# Altium PCB pdb-25.PcbDoc (part 1 of 4)
Units mil, origin at the board's own origin, x right, y up, seen from the top; angles counter-clockwise.
Board outline 5000 x 5500 mil, 4 copper layers (Top Layer, GND, 3V3, Bottom Layer), stack 23.756 mil thick; 410 components, 167 nets, 1014 pads, 884 vias.
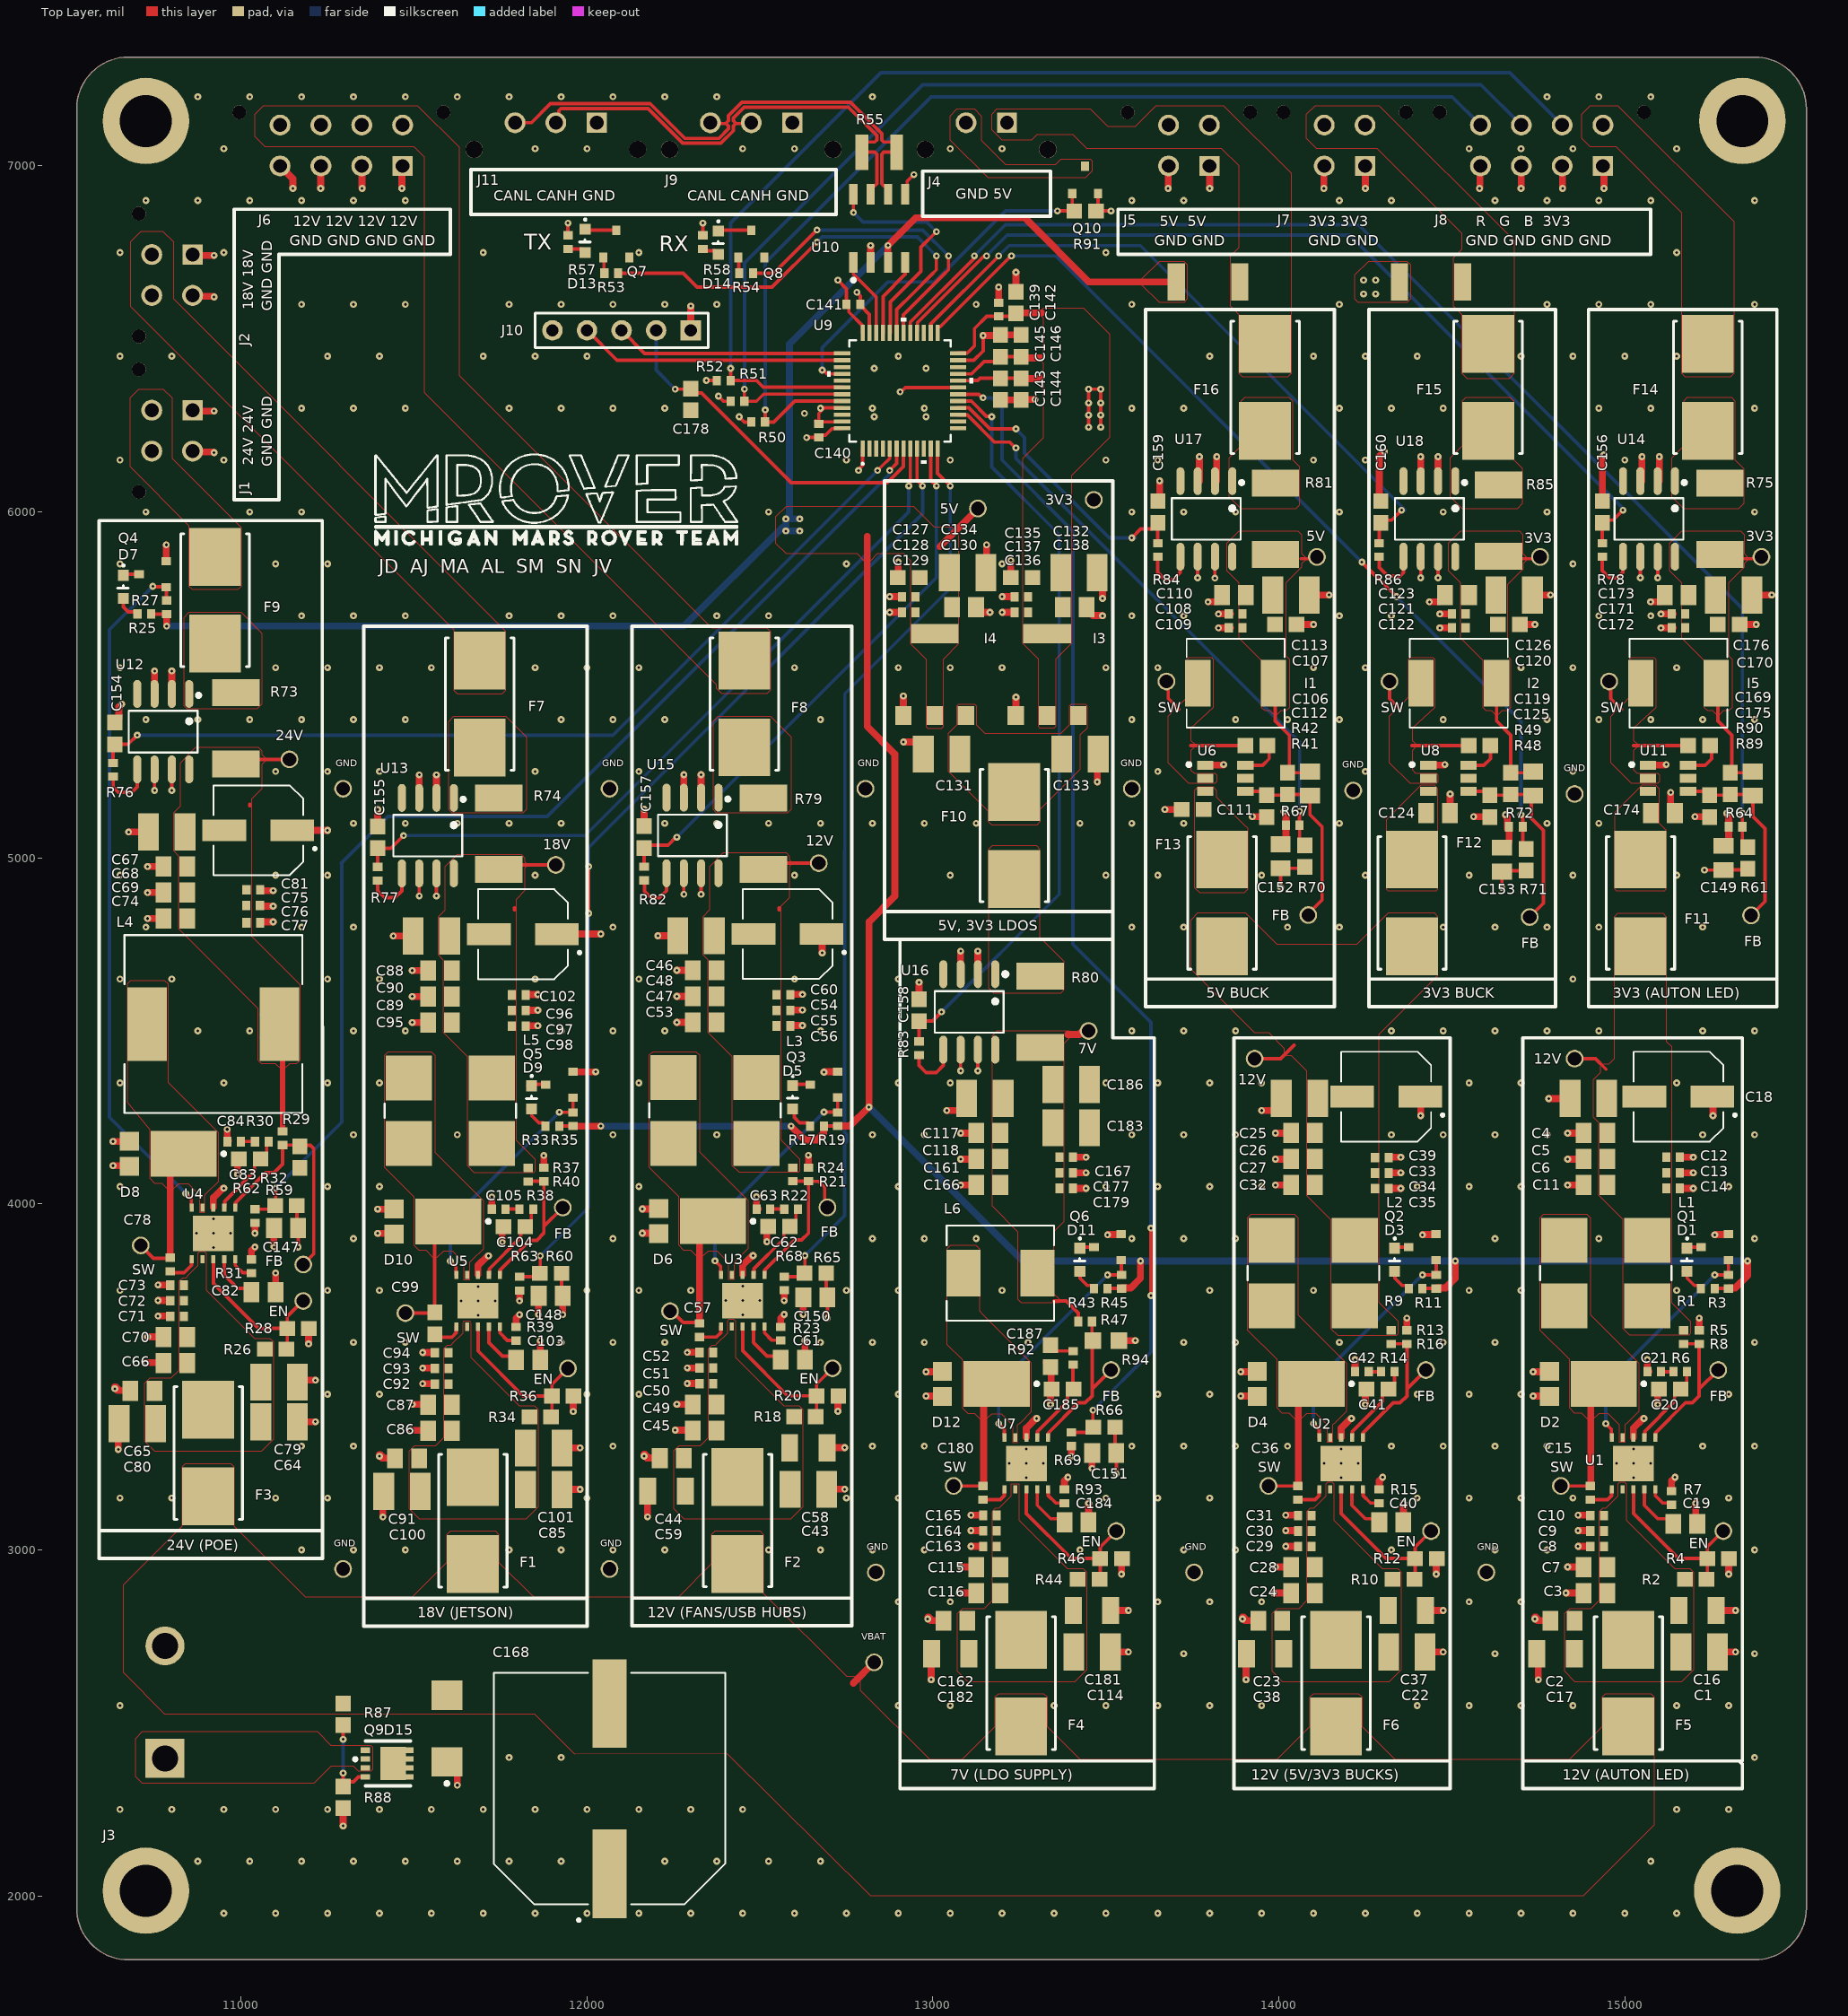
[diagram p0: Top Layer view]
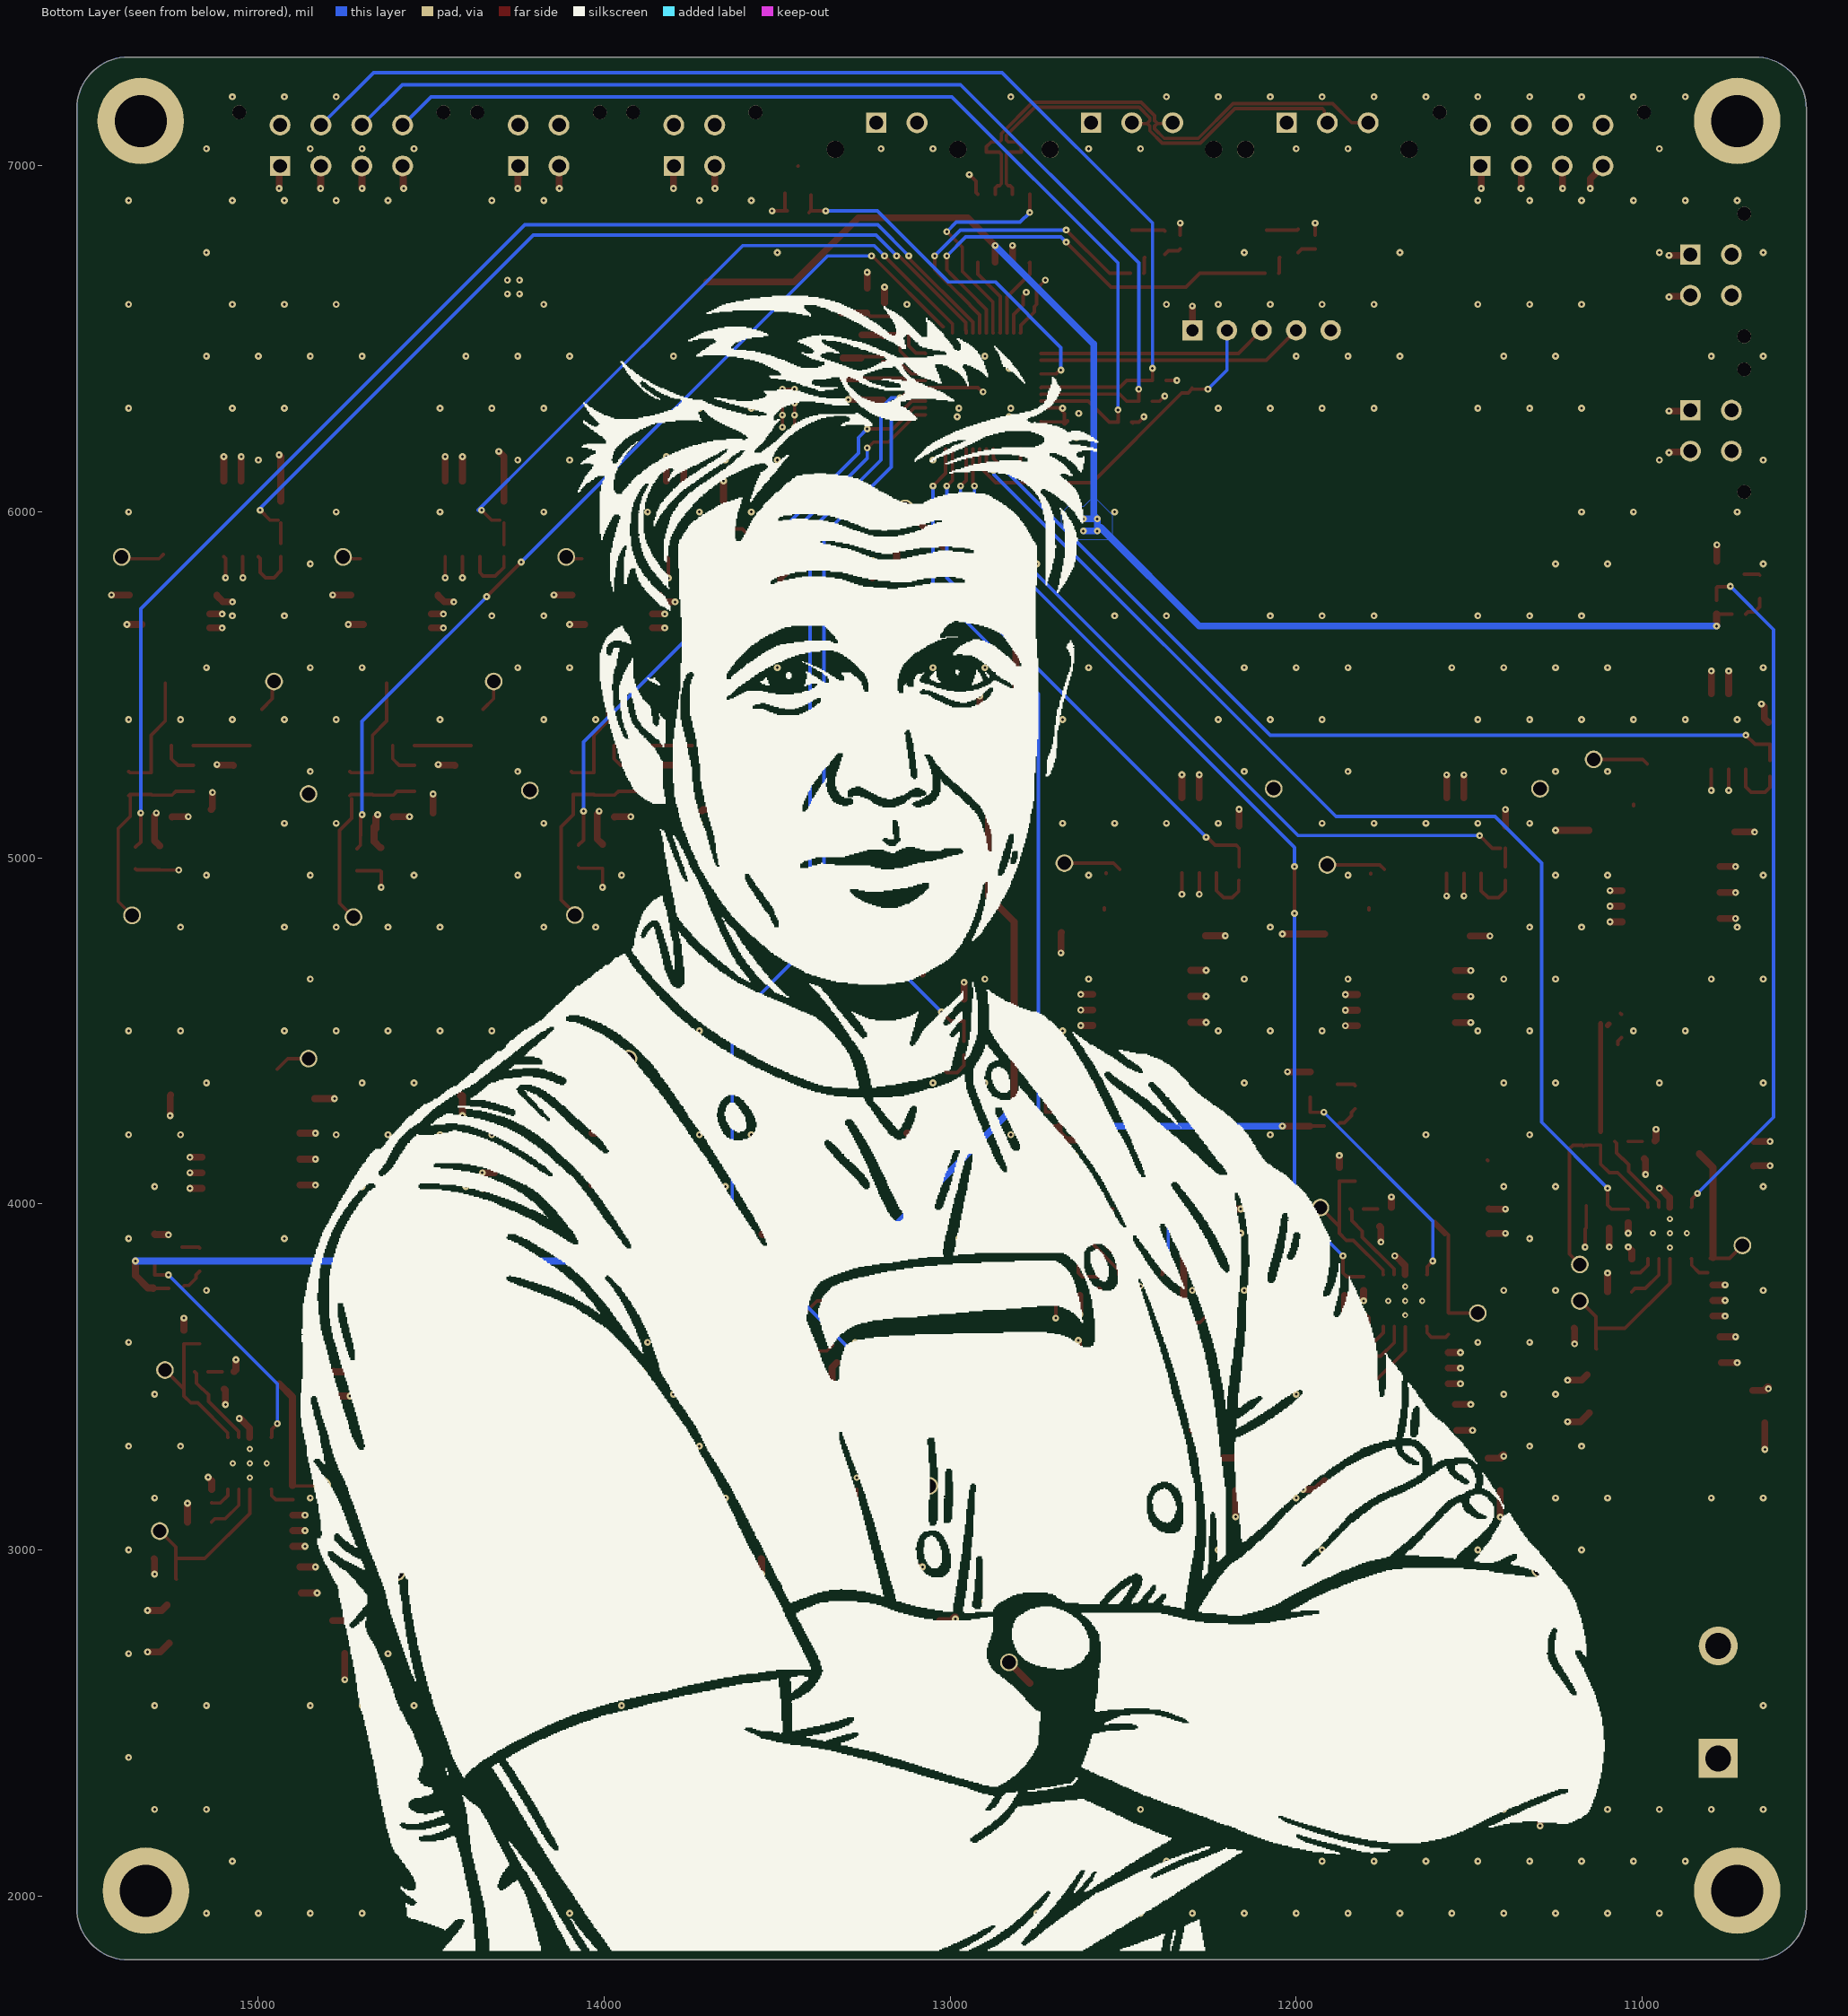
[diagram p1: Bottom Layer view, seen from below]
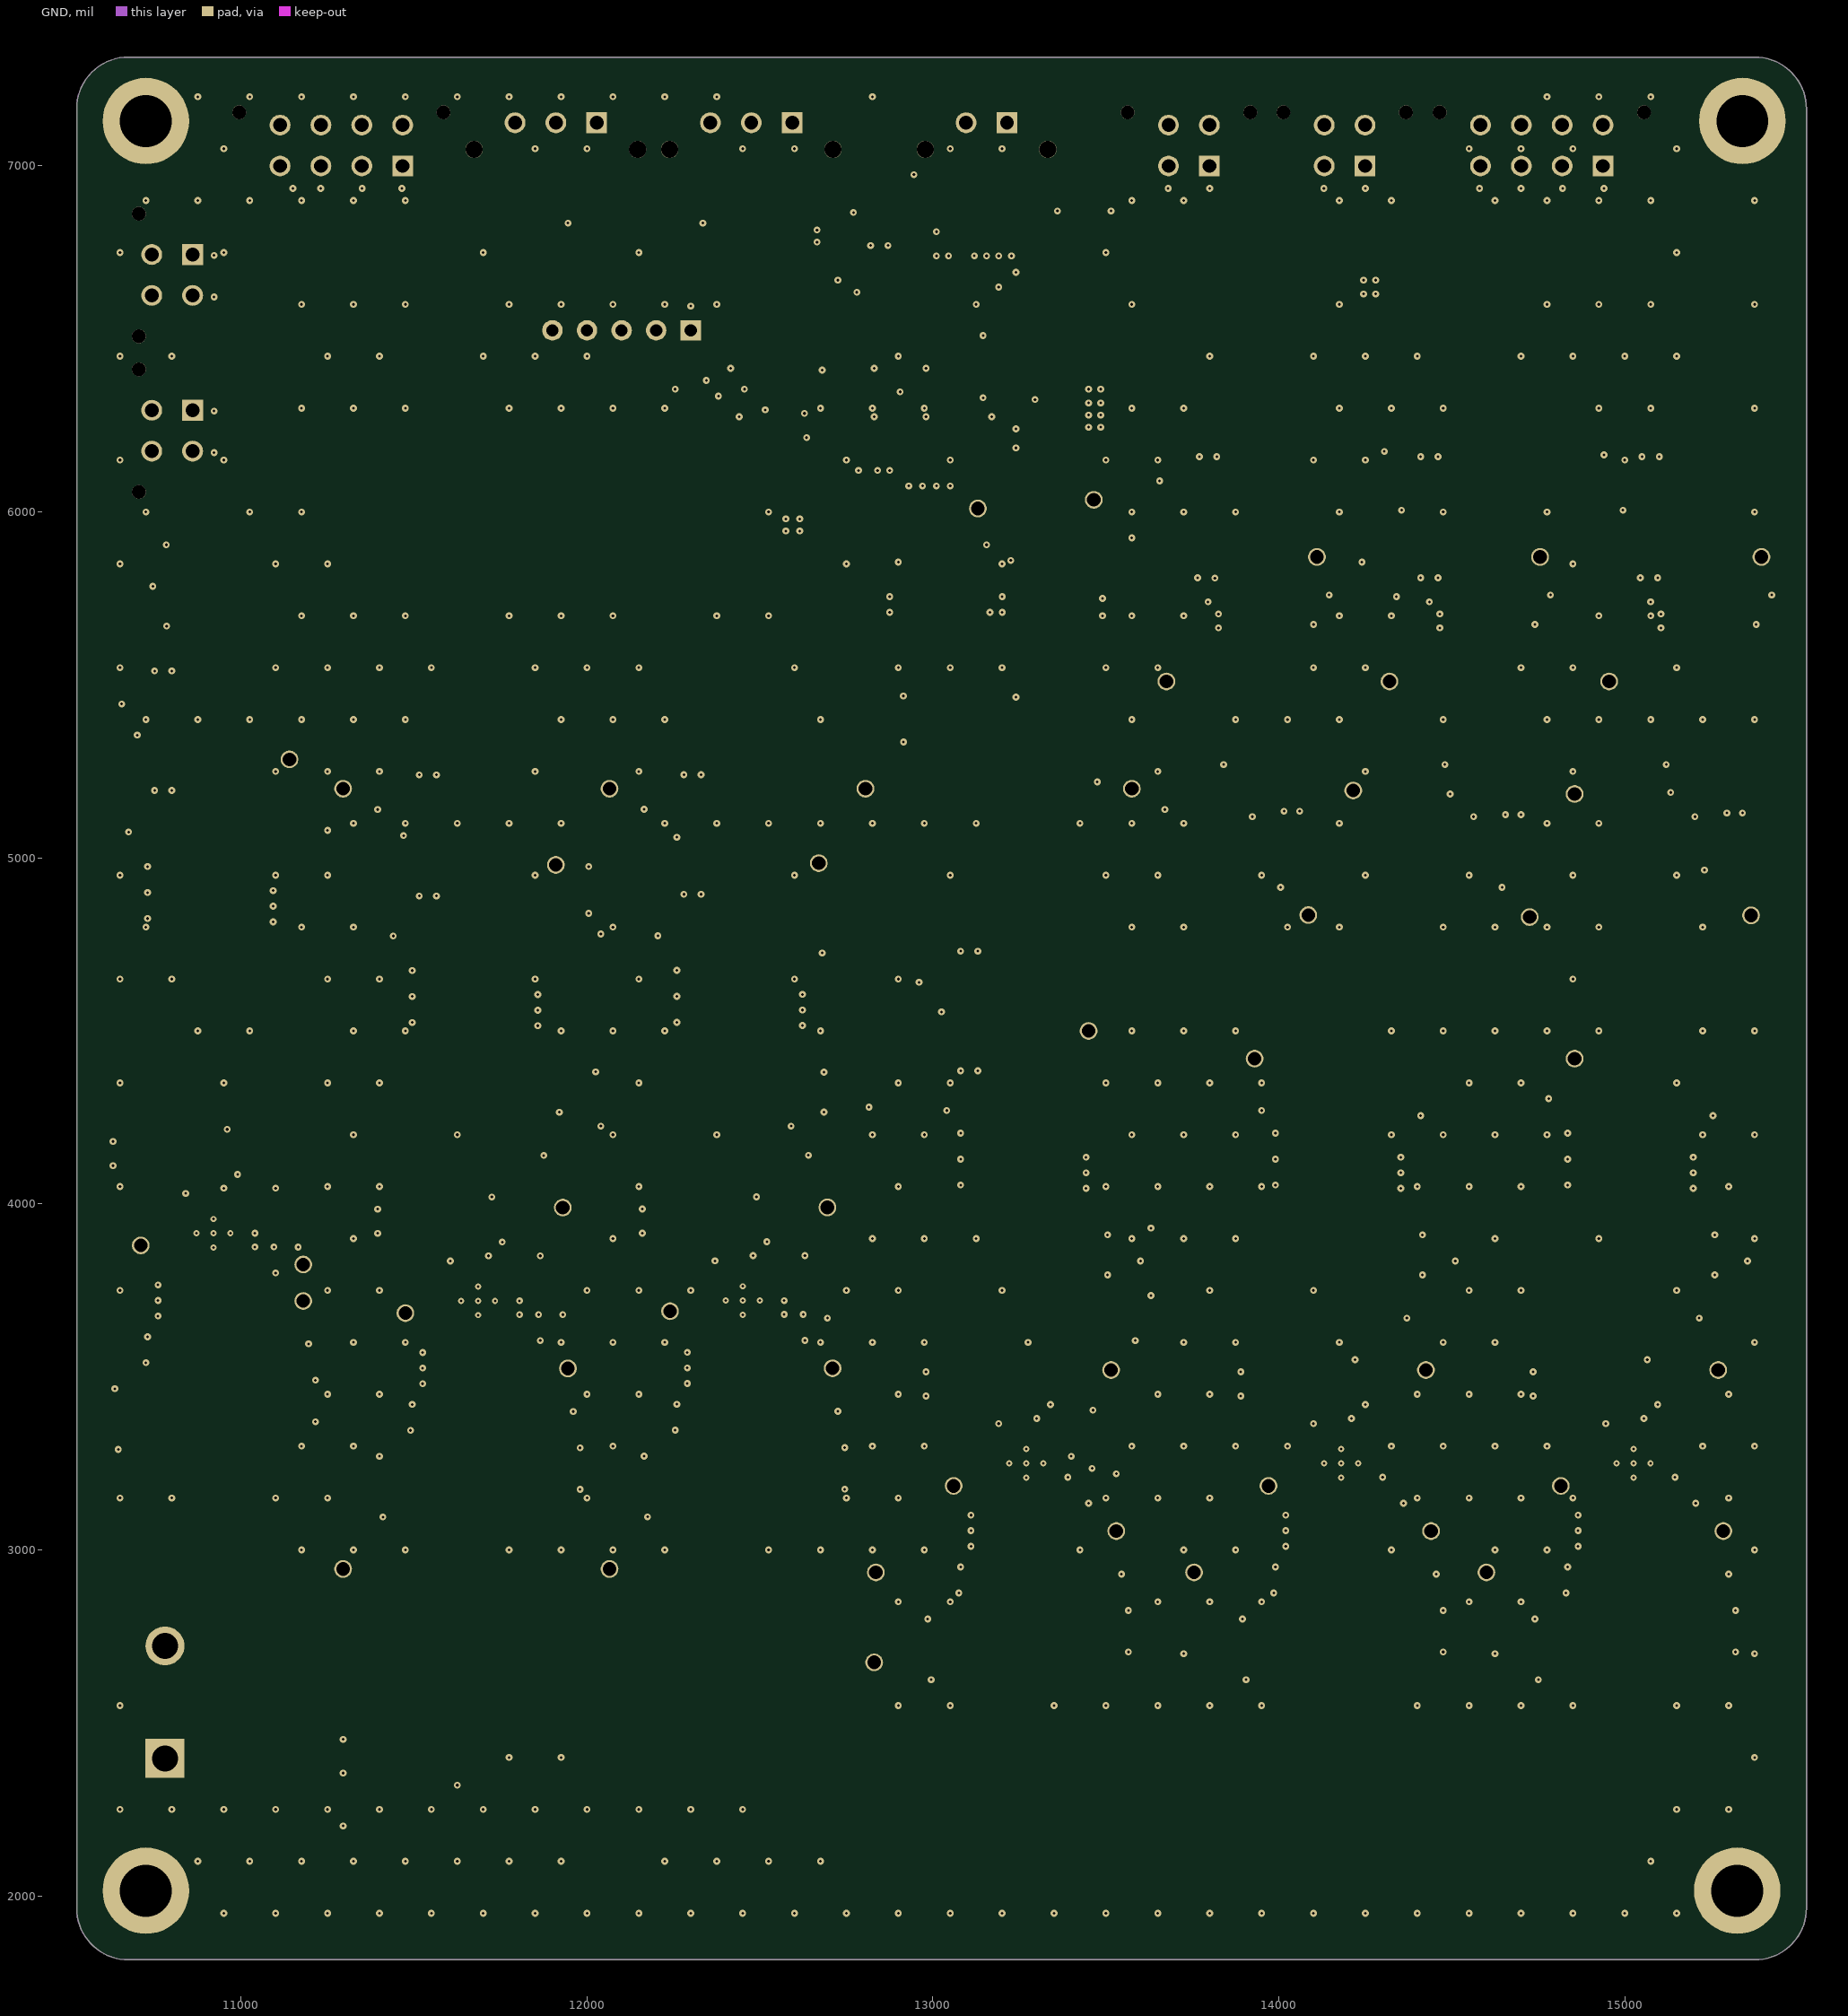
[diagram p2: GND]
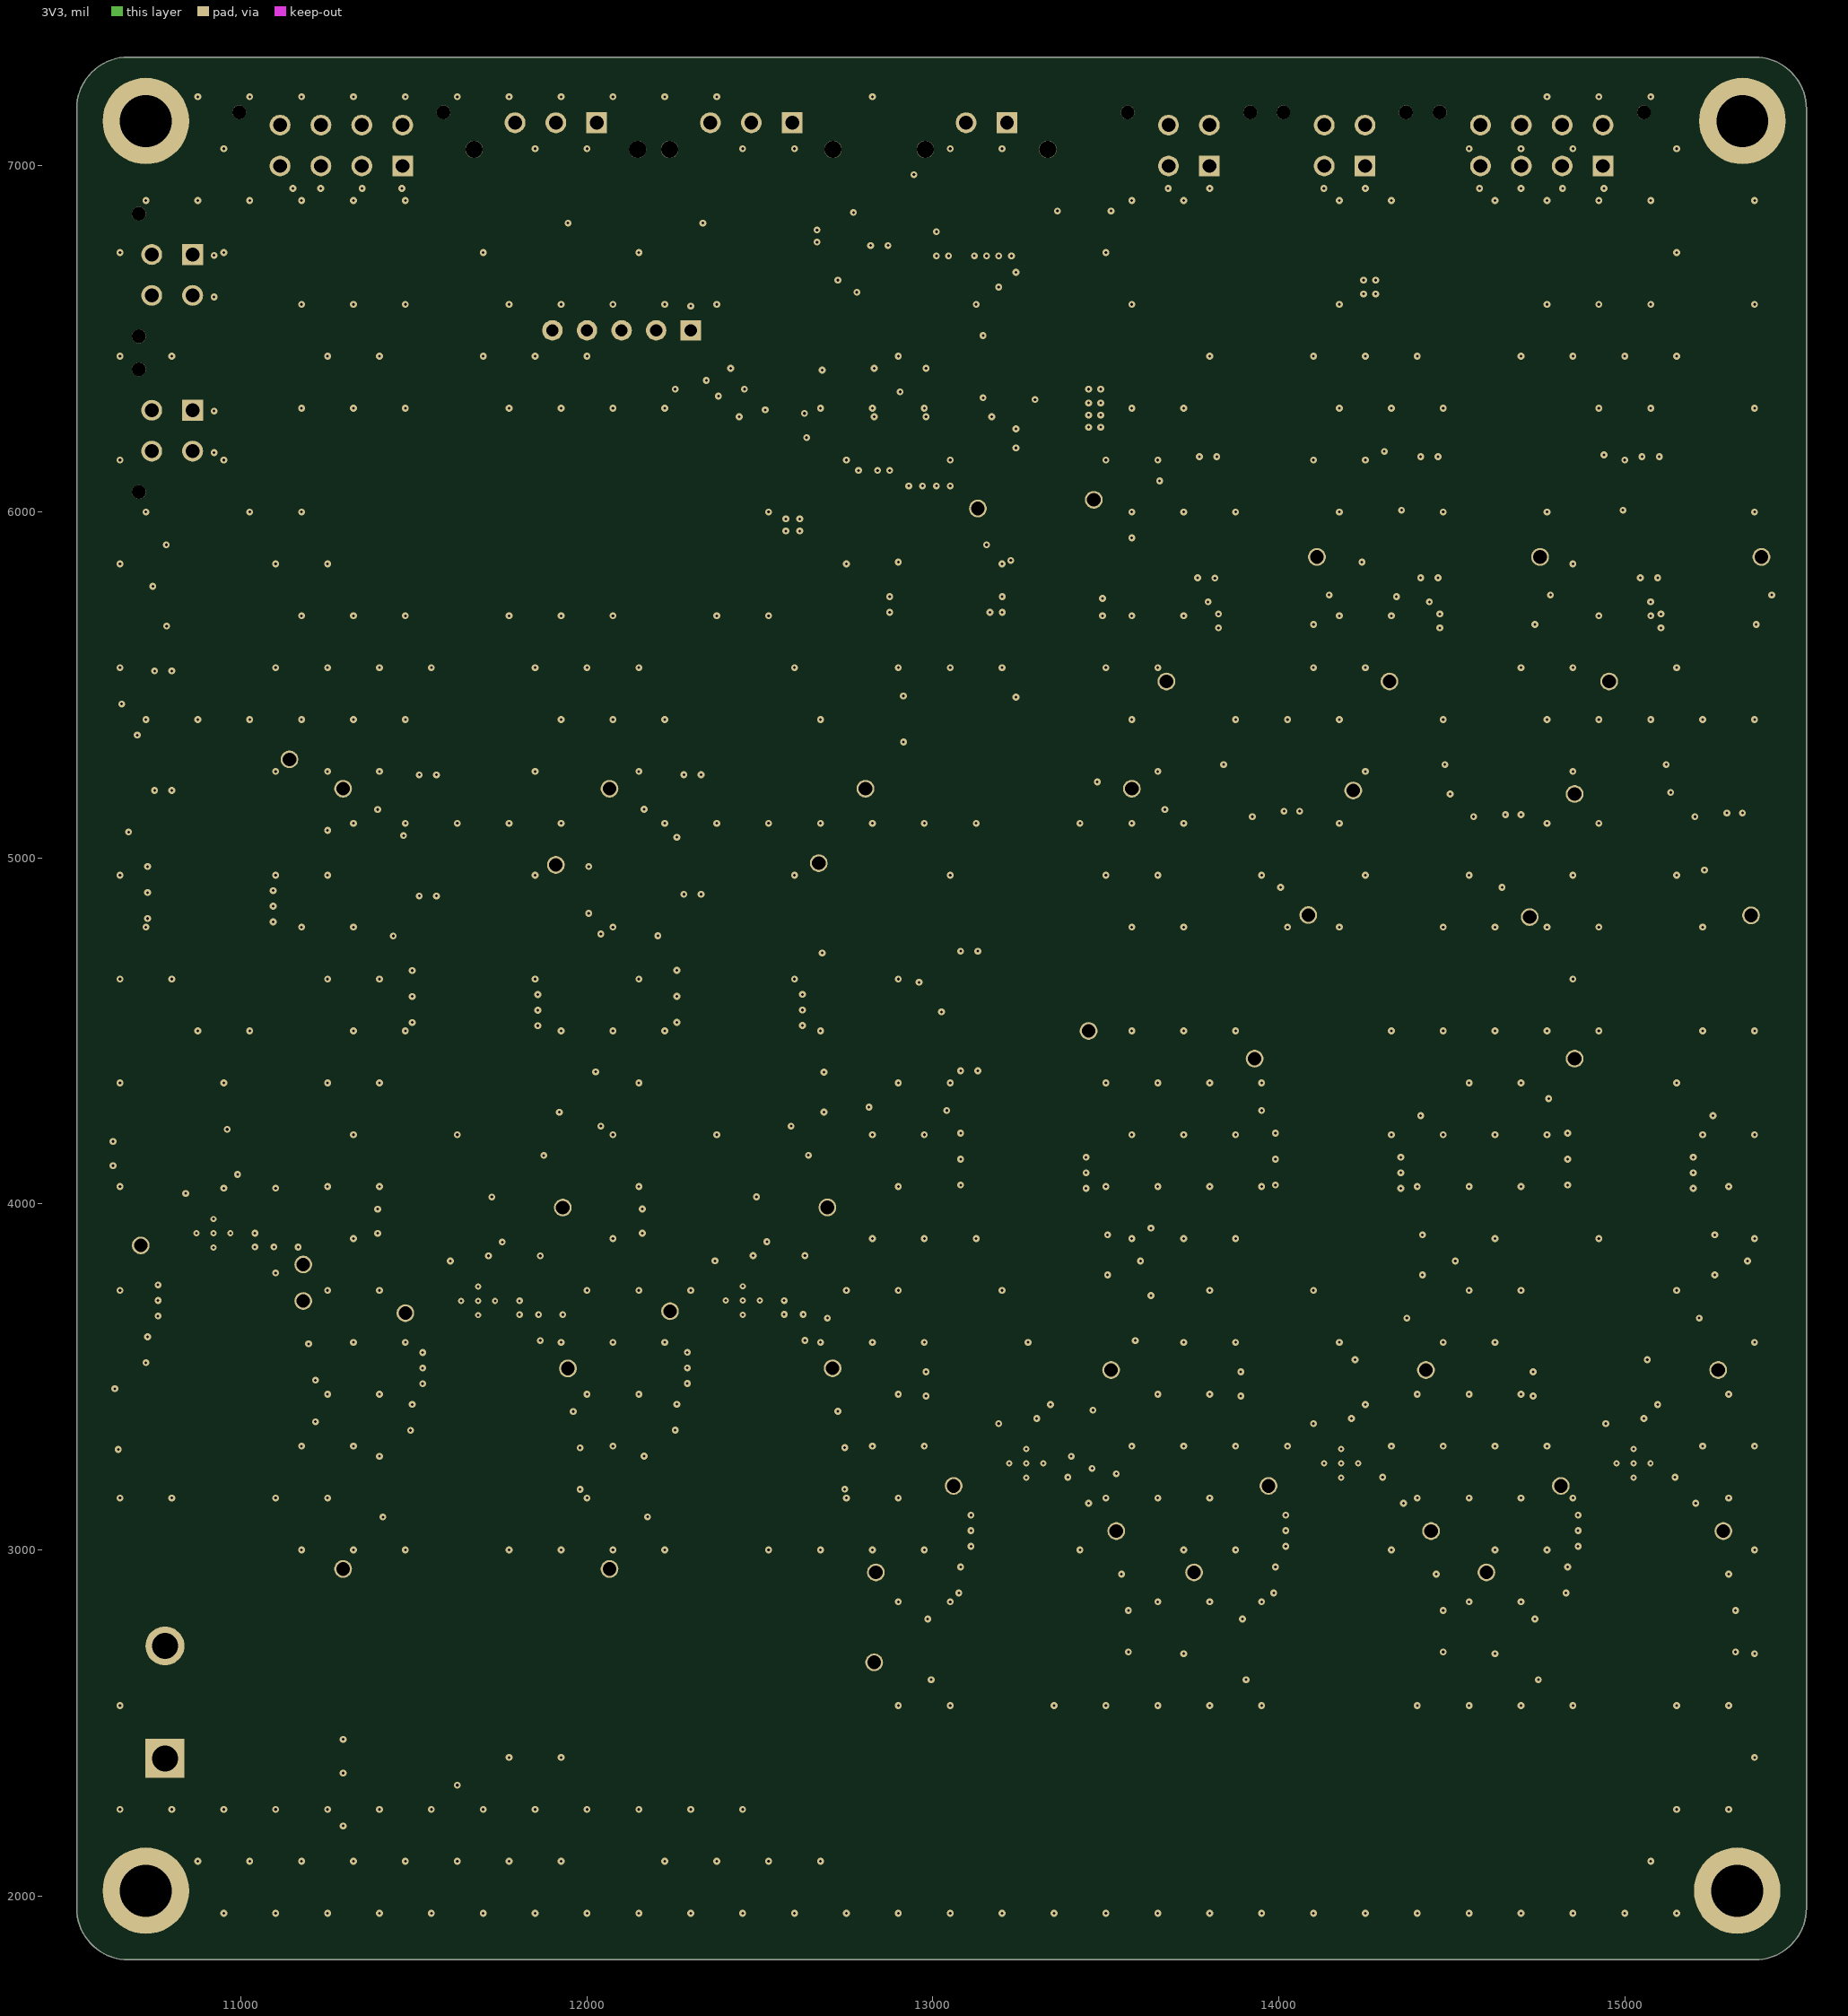
[diagram p3: 3V3]

## Layer stack, top to bottom
Top Solder: solder mask 0.4, Solder Resist, Dk 3.5
Top Layer: signal copper 1.4
Dielectric 2: prepreg 2.8, PP-006, Dk 4.1
GND: signal copper 1.378
Dielectric 1: dielectric 12.6, FR-4, Dk 4.8
3V3: signal copper 1.378
Dielectric 3: prepreg 2.8, PP-006, Dk 4.1
Bottom Layer: signal copper 1.4
Bottom Solder: solder mask 0.4, Solder Resist, Dk 3.5

## Board outline
10525,1965 10525,7165 cw(c10675,7165) 10675,7315 15375,7315 cw(c15375,7165) 15525,7165 15525,1965 cw(c15375,1965) 15375,1815 10675,1815 cw(c10675,1965)

## Design rules (kind name [scope] priority, off if disabled: settings)
BoardOutlineClearance [All] p1: gap=7.87 ignorepadtopadclearanceinfootprint=FALSE
Clearance [All] p1: gap=4 ignorepadtopadclearanceinfootprint=TRUE except(5: Arc-Via Track-Via SMDPad-Via THPad-Via Via-Via Via-Fill Via-Poly Via-Region Via-Text; 9.84: Arc-Hole Track-Hole SMDPad-Hole THPad-Hole Via-Hole Fill-Hole Poly-Hole Region-Hole Text-Hole; 10: THPad-THPad)
ComponentClearance [All] p1: gap=4 collisioncheckmode=3 verticalgap=4 showdistances=TRUE
DiffPairsRouting [All] p1: maxlimit=4 minlimit=4 mostfreqgap=4 toplayer_minwidth=4 toplayer_maxwidth=71497.94 toplayer_prefwidth=4 midlayer1_minwidth=4 midlayer1_maxwidth=71497.94 midlayer1_prefwidth=4 midlayer2_minwidth=4 midlayer2_maxwidth=71497.94 midlayer2_prefwidth=4 bottomlayer_minwidth=4 bottomlayer_maxwidth=71497.94 bottomlayer_prefwidth=4 maxuncoupledlength=500
Height [All] p1: minheight=0 maxheight=71497.94 prefheight=500
HoleSize [All] p1: absolutevalues=TRUE maxlimit=248.03 minlimit=7.87 maxpercent=80.000 minpercent=20.000
HoleToHoleClearance [All] p1: gap=9.84 allowstackedmicrovias=FALSE
MinimumAnnularRing [All] p1: minimumring=3
MinimumSolderMaskSliver [All] p1: minsoldermaskwidth=0
PlaneClearance [All] p1: clearance=4
PlaneConnect PlaneConnectPowerPads [InPadClass('PowerPads')] p1: planeconnectstyle=Direct reliefexpansion=20 reliefentries=4 reliefconductorwidth=10 reliefairgap=10
PlaneConnect [All] p2: pad.planeconnectstyle=Relief pad.reliefexpansion=11.81 pad.reliefentries=4 pad.reliefconductorwidth=4 pad.reliefairgap=4 via.planeconnectstyle=Direct via.reliefexpansion=11.81 via.reliefentries=4 via.reliefconductorwidth=5 via.reliefairgap=5
PolygonConnect PolygonConnectPowerPads [All vs (InPadClass('PowerPads'))] p1: connectstyle=Direct reliefconductorwidth=10 reliefentries=4 polygonreliefangle="90 Angle" airgapwidth=10
PolygonConnect [All] p2: connectstyle=Direct reliefconductorwidth=4 reliefentries=4 polygonreliefangle="90 Angle" airgapwidth=4
RoutingVias [All] p1: holewidth=7.87 width=17.72 viastyle="Through Hole" minholewidth=7.87 minwidth=17.72 maxholewidth=248.03 maxwidth=257.87
SilkToSilkClearance [All] p1: silktosilkclearance=0
SilkToSolderMaskClearance [IsPad] p1: minsilkscreentomaskgap=4 clearancetoexposedcopper=TRUE
SolderMaskExpansion [All] p1: expansion=2.95 istentingtop=FALSE
Width [All] p1: maxlimit=71497.94 minlimit=4 preferedwidth=4
20 further rules are at their usual default settings.

## Classes and differential pairs
component class 12V_Buck_For_LDOs: C114 C115 C116 C117 C118 C161 C162 C163 C164 C165 C166 C167 C177 C179 C180 C181 C182 C183 C184 C185 C186 C187 D11 D12 En F4 L6 Q6 R43 R44 R45 R46 R47 R93 U7
component class 3V3_Buck_For_Auton_LED: C169 C170 C171 C172 C173 C174 C175 C176 F11 I5 R89 R90 U11
component class Thermal_Sens: C147 C148 C149 C150 C151 C152 C153 R59 R60 R61 R62 R63 R64 R65 R66 R67 R68 R69 R70 R71 R72
component class MCU: C139 C140 C141 C142 C143 C144 C145 C146 C178 J10 Q10 R50 R51 R52 R91 U9
component class LDOs: C127 C128 C129 C130 C131 C132 C133 C134 C135 C136 C137 C138 I3 I4
component class Current_Sens: C154 C155 C156 C157 C158 C159 C160 F7 F8 F9 F10 F14 F15 F16 R73 R74 R75 R76 R77 R78 R79 R80 R81 R82 R83 R84 R85 R86 U12 U13 U14 U15 U17 U18
component class Connectors: C168 D15 J1 J2 J3 J4 J5 J6 J7 J8 J9 J11 Q9 R87 R88
component class CAN_Transceiver: D13 D14 Q7 Q8 R53 R54 R55 R57 R58 U10
component class 24V_Buck: C64 C65 C66 C67 C68 C69 C70 C71 C72 C73 C74 C75 C76 C77 C78 C79 C80 C81 C82 C83 C84 D7 D8 F3 L4 Q4 R25 R26 R27 R28 R29 R30 R31 R32 U4
component class 18V_Buck: 18V C85 C86 C87 C88 C89 C90 C91 C92 C93 C94 C95 C96 C97 C98 C99 C100 C101 C102 C103 C104 C105 D9 D10 F1 L5 Q5 R33 R34 R35 R36 R37 R38 R39 R40 U5
component class 12V_Buck_For_Rest: C43 C44 C45 C46 C47 C48 C49 C50 C51 C52 C53 C54 C55 C56 C57 C58 C59 C60 C61 C62 C63 D5 D6 F2 L3 Q3 R17 R18 R19 R20 R21 R22 R23 R24 U3
component class 12V_Buck_For_Auton_LED: C1 C2 C3 C4 C5 C6 C7 C8 C9 C10 C11 C12 C13 C14 C15 C16 C17 C18 C19 C20 C21 D1 D2 F5 L1 Q1 R1 R2 R3 R4 R5 R6 R7 R8 TP1 TP2 TP3 TP4 U1
component class 12V_Buck_For_5V_3V3: C22 C23 C24 C25 C26 C27 C28 C29 C30 C31 C32 C33 C34 C35 C36 C37 C38 C39 C40 C41 C42 D3 D4 F6 L2 Q2 R9 R10 R11 R12 R13 R14 R15 R16 TP1 TP4 TP6 TP7 U2
component class 5V_Buck: C106 C107 C108 C109 C110 C111 C112 C113 F13 I1 R41 R42 U6
component class 3V3_Buck: C119 C120 C121 C122 C123 C124 C125 C126 F12 I2 R48 R49 U8
differential pair CAN: +CAN_P -CAN_N
differential pair FDCAN: +FDCAN_TX -FDCAN_RX

## Components (designator, comment, footprint, x,y, rotation, side; value= is the part's Value field where it differs from the comment)
3V3 "5003" TEST-POINT-0001 15395,5870 r90 top (schematic designator TP34)
3V3 "5003" TEST-POINT-0001 14755,5870 r90 top (schematic designator TP27)
3V3 "5003" TEST-POINT-0001 13465,6035 r0 top (schematic designator TP31)
5V "5003" TEST-POINT-0001 13130,6010 r90 top (schematic designator TP30)
5V "5003" TEST-POINT-0001 14110,5870 r90 top (schematic designator TP21)
7V "5003" TEST-POINT-0001 13450,4500 r90 top (schematic designator TP24)
12V "5003" TEST-POINT-0001 12670,4985 r0 top (schematic designator TP9)
12V "5003" TEST-POINT-0001 13930,4420 r0 top locked (schematic designator TP5)
12V "5003" TEST-POINT-0001 14855,4420 r0 top (schematic designator TP1)
18V "5003" TEST-POINT-0001 11910,4980 r90 top (schematic designator TP17)
24V "5003" TEST-POINT-0001 11140,5285 r90 top (schematic designator TP13)
C1 "CL32B106KBJNNNE" CAP-1210 15215,2705 r180 top
C2 "CC0805KKX7R9BB105" CAP-0805 14820,2795 r0 top
C3 "CC0805KRX7R9BB104" CAP-0805 14915,2875 r0 top
C4 "CL32B106KBJNNNE" CAP-1210 14895,4305 r0 top
C5 "CC0805KKX7R9BB105" CAP-0805 14915,4205 r0 top
C6 "CC0805KRX7R9BB104" CAP-0805 14915,4130 r0 top
C7 "GRM2195C1H103JA01D" CAP-0805 14915,2950 r0 top
C8 "CC0402KRX7R9BB102" CAP-0402 14920,3009.5 r0 top
C9 "CC0402JRNPO9BN101" CAP-0402 14920,3054.5 r0 top
C10 "CC0402JRNPO9BN100" CAP-0402 14920,3099.5 r0 top
C11 "GRM2195C1H103JA01D" CAP-0805 14915,4055 r0 top
C12 "CC0402KRX7R9BB102" CAP-0402 15139.68,4135 r180 top
C13 "CC0402JRNPO9BN101" CAP-0402 15139.68,4090 r180 top
C14 "CC0402JRNPO9BN100" CAP-0402 15139.68,4045 r180 top
C15 "CC0402KRX7R7BB104" CAP-0402 14900,3165 r90 top
C16 "CC1206KKX7R0BB225" CAP-1206 15210,2825 r180 top
C17 "CC1206KKX7R0BB225" CAP-1206 14800,2700 r0 top
C18 "EEH-ZC1V470P" CAP_EEHZC1V470P 15155,4310 r180 top
C19 "GRM2165C1H272JA01D" CAP-0805 15175,3075 r180 top
C20 "CC0603CRNPO0BN6R8" CAP-0603 15130,3465 r0 top
C21 "0402N511J500CT" CAP-0402 15085,3515 r0 top
C22 "CL32B106KBJNNNE" CAP-1210 14370,2705 r180 top locked
C23 "CC0805KKX7R9BB105" CAP-0805 13975,2795 r0 top locked
C24 "CC0805KRX7R9BB104" CAP-0805 14070,2875 r0 top locked
C25 "CL32B106KBJNNNE" CAP-1210 14060,4305 r0 top locked
C26 "CC0805KKX7R9BB105" CAP-0805 14070,4205 r0 top locked
C27 "CC0805KRX7R9BB104" CAP-0805 14070,4130 r0 top locked
C28 "GRM2195C1H103JA01D" CAP-0805 14070,2950 r0 top locked
C29 "CC0402KRX7R9BB102" CAP-0402 14075,3009.5 r0 top locked
C30 "CC0402JRNPO9BN101" CAP-0402 14075,3054.5 r0 top locked
C31 "CC0402JRNPO9BN100" CAP-0402 14075,3099.5 r0 top locked
C32 "GRM2195C1H103JA01D" CAP-0805 14070,4055 r0 top locked
C33 "CC0402KRX7R9BB102" CAP-0402 14297.66,4134 r180 top locked
C34 "CC0402JRNPO9BN101" CAP-0402 14297.66,4089 r180 top locked
C35 "CC0402JRNPO9BN100" CAP-0402 14297.66,4044 r180 top locked
C36 "CC0402KRX7R7BB104" CAP-0402 14055,3165 r90 top locked
C37 "CC1206KKX7R0BB225" CAP-1206 14370,2825 r180 top locked
C38 "CC1206KKX7R0BB225" CAP-1206 13960,2700 r0 top locked
C39 "EEH-ZC1V470P" CAP_EEHZC1V470P 14310,4310 r180 top locked
C40 "GRM2165C1H272JA01D" CAP-0805 14325,3080 r180 top locked
C41 "CC0603CRNPO0BN6R8" CAP-0603 14285,3465 r0 top locked
C42 "0402N511J500CT" CAP-0402 14240,3515 r0 top locked
C43 "CL32B106KBJNNNE" CAP-1210 12640,3175 r180 top
C44 "CC0805KKX7R9BB105" CAP-0805 12245,3265 r0 top
C45 "CC0805KRX7R9BB104" CAP-0805 12340,3345 r0 top
C46 "CL32B106KBJNNNE" CAP-1210 12315,4775 r0 top
C47 "CC0805KKX7R9BB105" CAP-0805 12340,4600 r0 top
C48 "CC0805KRX7R9BB104" CAP-0805 12340,4675 r0 top
C49 "GRM2195C1H103JA01D" CAP-0805 12340,3420 r0 top
C50 "CC0402KRX7R9BB102" CAP-0402 12345,3480.5 r0 top
C51 "CC0402JRNPO9BN101" CAP-0402 12345,3525.5 r0 top
C52 "CC0402JRNPO9BN100" CAP-0402 12345,3570.5 r0 top
C53 "GRM2195C1H103JA01D" CAP-0805 12340,4525 r0 top
C54 "CC0402KRX7R9BB102" CAP-0402 12567.66,4604.5 r180 top
C55 "CC0402JRNPO9BN101" CAP-0402 12567.66,4559.5 r180 top
C56 "CC0402JRNPO9BN100" CAP-0402 12567.66,4514.5 r180 top
C57 "CC0402KRX7R7BB104" CAP-0402 12325,3635 r90 top
C58 "CC1206KKX7R0BB225" CAP-1206 12640,3295 r180 top
C59 "CC1206KKX7R0BB225" CAP-1206 12230,3170 r0 top
C60 "EEH-ZC1V470P" CAP_EEHZC1V470P 12580,4780 r180 top
C61 "GRM2165C1H272JA01D" CAP-0805 12595,3550 r180 top
C62 "CC0603CRNPO0BN6R8" CAP-0603 12555,3935 r0 top
C63 "0402N511J500CT" CAP-0402 12510,3985 r0 top
C64 "CL32B106KBJNNNE" CAP-1210 11110,3370 r180 top
C65 "CC0805KKX7R9BB105" CAP-0805 10715,3460 r0 top
C66 "CC0805KRX7R9BB104" CAP-0805 10810,3540 r0 top
C67 "CL32B106KBJNNNE" CAP-1210 10785,5075 r0 top
C68 "CC0805KKX7R9BB105" CAP-0805 10810,4975 r0 top
C69 "CC0805KRX7R9BB104" CAP-0805 10810,4900 r0 top
C70 "GRM2195C1H103JA01D" CAP-0805 10810,3615 r0 top
C71 "CC0402KRX7R9BB102" CAP-0402 10815,3675 r0 top
C72 "CC0402JRNPO9BN101" CAP-0402 10815,3720 r0 top
C73 "CC0402JRNPO9BN100" CAP-0402 10815,3765 r0 top
C74 "GRM2195C1H103JA01D" CAP-0805 10810,4825 r0 top
C75 "CC0402KRX7R9BB102" CAP-0402 11035.32,4907.5 r180 top
C76 "CC0402JRNPO9BN101" CAP-0402 11035,4862.5 r180 top
C77 "CC0402JRNPO9BN100" CAP-0402 11035.32,4812.5 r180 top
C78 "CC0402KRX7R7BB104" CAP-0402 10795,3825 r90 top
C79 "CL32B106KBJNNNE" CAP-1210 11110,3485 r180 top
C80 "CL32B106KBJNNNE" CAP-1210 10700,3365 r0 top
C81 "EEH-ZC1V470P" CAP_EEHZC1V470P 11050,5080 r180 top
C82 "GRM2165C1H272JA01D" CAP-0805 11065,3745 r180 top
C83 "CC0603CRNPO0BN6R8" CAP-0603 11025,4130 r0 top
C84 "CC0402JRX7R9BB392" CAP-0402 10980,4180 r0 top
C85 "CL32B106KBJNNNE" CAP-1210 11875,3174.5 r180 top
C86 "CC0805KKX7R9BB105" CAP-0805 11575,3344.5 r0 top
C87 "CC0805KRX7R9BB104" CAP-0805 11575,3419.5 r0 top
C88 "CL32B106KBJNNNE" CAP-1210 11550,4774.5 r0 top
C89 "CC0805KKX7R9BB105" CAP-0805 11575,4599.5 r0 top
C90 "CC0805KRX7R9BB104" CAP-0805 11575,4674.5 r0 top
C91 "GRM2195C1H103JA01D" CAP-0805 11480,3264.5 r0 top
C92 "CC0402KRX7R9BB102" CAP-0402 11580,3479.5 r0 top
C93 "CC0402JRNPO9BN101" CAP-0402 11580,3524.5 r0 top
C94 "CC0402JRNPO9BN100" CAP-0402 11580,3569.5 r0 top
C95 "GRM2195C1H103JA01D" CAP-0805 11575,4524.5 r0 top
C96 "CC0402KRX7R9BB102" CAP-0402 11802.66,4604 r180 top
C97 "CC0402JRNPO9BN101" CAP-0402 11802.66,4559 r180 top
C98 "CC0402JRNPO9BN100" CAP-0402 11802.66,4514 r180 top
C99 "CC0603KRX7R0BB104" CAP-0603 11560,3654.5 r90 top
C100 "CL32B106KBJNNNE" CAP-1210 11465,3169.5 r0 top
C101 "CL32B106KBJNNNE" CAP-1210 11875,3294.5 r180 top
C102 "EEH-ZC1V470P" CAP_EEHZC1V470P 11815,4779.5 r180 top
C103 "GRM2165C1H272JA01D" CAP-0805 11830,3549.5 r180 top
C104 "CC0603CRNPO0BN6R8" CAP-0603 11790,3934.5 r0 top
C105 "0402N511J500CT" CAP-0402 11744.68,3984.5 r0 top
C106 "CC0603KRX7R0BB104" CAP-0603 13935,5325 r180 top
C107 "CC0603KRX5R6BB106" CAP-0603 14020,5675 r180 top
C108 "CC0402KRX7R7BB104" CAP-0402 13875,5705 r0 top
C109 "CC0402KRX7R7BB104" CAP-0402 13875,5665 r0 top
C110 "CC0805JRNPO9BN471" CAP-0805 13870,5760 r0 top
C111 "CC0603KRX5R8BB475" CAP-0603 13750.71,5140 r0 top
C112 "CC0805JRNPO9BN820" CAP-0805 14090,5215 r270 top
C113 "GRM32ER61C476KE15L" CAP-1210 14035,5760 r0 top
C114 "CL32B106KBJNNNE" CAP-1210 13460,2705 r180 top
C115 "CC0805KKX7R9BB105" CAP-0805 13160,2950 r0 top
C116 "CC0805KRX7R9BB104" CAP-0805 13160,2875 r0 top
C117 "CL32B106KBJNNNE" CAP-1210 13150,4305 r0 top
C118 "CC0805KKX7R9BB105" CAP-0805 13160,4205 r0 top
C119 "CC0603KRX7R0BB104" CAP-0603 14580,5325 r180 top
C120 "CC0603KRX5R6BB106" CAP-0603 14665,5675 r180 top
C121 "CC0402KRX7R7BB104" CAP-0402 14520,5705 r0 top
C122 "CC0402KRX7R7BB104" CAP-0402 14520,5665 r0 top
C123 "CC0805JRNPO9BN471" CAP-0805 14515,5760 r0 top
C124 "CC0805KKX5R9BB475" CAP-0805 14460,5130 r180 top
C125 "CC0805JRNPO9BN820" CAP-0805 14735,5215 r90 top
C126 "GRM32ER61C476KE15L" CAP-1210 14680,5760 r180 top
C127 "CC0603KRX5R6BB106" CAP-0603 12930,5810 r0 top
C128 "CC0402KRX7R7BB104" CAP-0402 12930,5755 r0 top
C129 "CC0402KRX7R7BB104" CAP-0402 12930,5710 r0 top
C130 "CC0805JRNPO9BN471" CAP-0805 13090,5725 r180 top
C131 "293D106X9016A2TE3" CAP-1210 13025,5300 r0 top
C132 "293D106X9016A2TE3" CAP-1210 13422.2,5825 r180 top
C133 "293D106X9016A2TE3" CAP-1210 13425,5300 r180 top
C134 "293D106X9016A2TE3" CAP-1210 13100,5825 r180 top
C135 "CC0603KRX5R6BB106" CAP-0603 13256.5,5810 r0 top
C136 "CC0402KRX7R7BB104" CAP-0402 13255.32,5710 r0 top
C137 "CC0402KRX7R7BB104" CAP-0402 13255.32,5755 r0 top
C138 "CC0805JRNPO9BN471" CAP-0805 13410,5725 r180 top
C139 "CC0402KRX7R7BB104" CAP-0402 13190,6585 r270 top
C140 "CC0402KRX7R7BB104" CAP-0402 12670,6235 r270 top
C141 "CC0402KRX7R7BB104" CAP-0402 12770,6600 r180 top
C142 "CC0603KRX5R8BB475" CAP-0603 13240,6605 r270 top
C143 "CC0603KPX7R9BB103" CAP-0603 13195,6355 r90 top
C144 "CC0603KRX7R7BB105" CAP-0603 13255,6355 r90 top
C145 "CC0603KPX7R9BB103" CAP-0603 13195,6480 r270 top
C146 "CC0603KRX7R7BB105" CAP-0603 13255,6480 r270 top
C147 "CC0805KRX7R9BB104" CAP-0805 11130,3930 r180 top
C148 "CC0805KRX7R9BB104" CAP-0805 11895,3734.5 r180 top
C149 "CC0805KRX7R9BB104" CAP-0805 15285,5000 r90 top
C150 "CC0805KRX7R9BB104" CAP-0805 12660,3730 r180 top
C151 "CC0805KRX7R9BB104" CAP-0805 13495,3280 r180 top
C152 "CC0805KRX7R9BB104" CAP-0805 14005,5005 r90 top
C153 "CC0805KRX7R9BB104" CAP-0805 14645,4995 r90 top
C154 "CC0603KRX7R0BB104" CAP-0603 10635,5360 r90 top
C155 "CC0603KRX7R0BB104" CAP-0603 11395,5059.5 r90 top
C156 "CC0603KRX7R0BB104" CAP-0603 14935,6000 r90 top
C157 "CC0603KRX7R0BB104" CAP-0603 12165,5060 r90 top
C158 "CC0603KRX7R0BB104" CAP-0603 12960,4560 r90 top
C159 "CC0603KRX7R0BB104" CAP-0603 13650,6000 r90 top
C160 "CC0603KRX7R0BB104" CAP-0603 14295,6000 r90 top
C161 "CC0805KRX7R9BB104" CAP-0805 13160,4130 r0 top
C162 "GRM2195C1H103JA01D" CAP-0805 13065,2795 r0 top
C163 "CC0402KRX7R9BB102" CAP-0402 13165,3010 r0 top
C164 "CC0402JRNPO9BN101" CAP-0402 13165,3055 r0 top
C165 "CC0402JRNPO9BN100" CAP-0402 13165,3100 r0 top
C166 "GRM2195C1H103JA01D" CAP-0805 13160,4055 r0 top
C167 "CC0402KRX7R9BB102" CAP-0402 13385,4135 r180 top
C168 "EEETK2A101AM" CAP-100U-0001 12065,2310 r90 top
C169 "CC0603KRX7R0BB104" CAP-0603 15215,5325 r180 top
C170 "CC0603KRX5R6BB106" CAP-0603 15300,5675 r180 top
C171 "CC0402KRX7R7BB104" CAP-0402 15155,5705 r0 top
C172 "CC0402KRX7R7BB104" CAP-0402 15155,5665 r0 top
C173 "CC0805JRNPO9BN471" CAP-0805 15150,5760 r0 top
C174 "CC0805KKX5R9BB475" CAP-0805 15110,5130 r180 top
C175 "CC0805JRNPO9BN820" CAP-0805 15370,5215 r90 top
C176 "GRM32ER61C476KE15L" CAP-1210 15315,5760 r180 top
C177 "CC0402JRNPO9BN101" CAP-0402 13385,4090 r180 top
C178 "CC0603KRX7R0BB104" CAP-0603 12300,6325 r90 top
C179 "CC0402JRNPO9BN100" CAP-0402 13385,4045 r180 top
C180 "CC0402KRX7R7BB104" CAP-0402 13145,3165 r90 top
C181 "CC1206KKX7R0BB225" CAP-1206 13460,2825 r180 top
C182 "CC1206KKX7R0BB225" CAP-1206 13050,2700 r0 top
C183 "GRM32ER61C476KE15L" CAP-1210 13400,4220 r0 top
C184 "GRM2165C1H272JA01D" CAP-0805 13415,3080 r180 top
C185 "CC0603CRNPO0BN6R8" CAP-0603 13375,3465 r0 top
C186 "GRM32ER61C476KE15L" CAP-1210 13400,4345 r0 top
C187 "GRM1885C1H302JA01D" CAP-0603 13340,3560 r270 top
D1 "BL-HKC36G-AV-TRB" LED-0603 15150,3895 r270 top
D2 "PDS760-13" DO-POWERDI5 14895,3480 r0 top
D3 "BL-HKC36G-AV-TRB" LED-0603 14305,3895 r270 top locked
D4 "PDS760-13" DO-POWERDI5 14050,3480 r0 top locked
D5 "BL-HKC36G-AV-TRB" LED-0603 12565,4365 r270 top
D6 "PDS760-13" DO-POWERDI5 12320,3950 r0 top
D7 "BL-HKC36G-AV-TRB" LED-0603 10630,5840 r270 top
D8 "PDS760-13" DO-POWERDI5 10790,4145 r0 top
D9 "BL-HKC36G-AV-TRB" LED-0603 11810,4364.5 r270 top
D10 "PDS760-13" DO-POWERDI5 11555,3949.5 r0 top
D11 "BL-HKC36G-AV-TRB" LED-0603 13395,3895 r270 top
D12 "PDS760-13" DO-POWERDI5 13140,3480 r0 top
D13 "BL-HKC36G-AV-TRB" LED-0603 11965,6840 r270 top
D14 "BL-HKC36G-AV-TRB" LED-0603 12350,6835 r270 top
D15 "SMBJ40CA" "DO-214AA (SMBJ)" 11595,2485 r270 top
EN "5003" TEST-POINT-0001 13530,3054.5 r90 top (schematic designator TP25)
EN "5003" TEST-POINT-0001 11180,3719.5 r90 top (schematic designator TP14)
EN "5003" TEST-POINT-0001 12710,3525 r90 top (schematic designator TP10)
EN "5003" TEST-POINT-0001 11945,3524.5 r90 top (schematic designator TP18)
EN "5003" TEST-POINT-0001 14440,3054.5 r90 top locked (schematic designator TP6)
EN "5003" TEST-POINT-0001 15285,3054.5 r0 top (schematic designator TP2)
F1 "01550900M" FUSE-0001 11670,3084.5 r90 top
F2 "01550900M" FUSE-0001 12435,3085 r90 top
F3 "01550900M" FUSE-0001 10905,3280 r90 top
F4 "01550900M" FUSE-0001 13255,2615 r90 top
F5 "01550900M" FUSE-0001 15010,2615 r90 top
F6 "01550900M" FUSE-0001 14165,2615 r90 top locked
F7 "01550900M" FUSE-0001 11690,5444.5 r90 top
F8 "01550900M" FUSE-0001 12455,5445 r90 top
F9 "01550900M" FUSE-0001 10925,5745 r90 top
F10 "01550900M" FUSE-0001 13235,5065 r90 top
F11 "01550900M" FUSE-0001 15045,4870 r90 top
F12 "01550900M" FUSE-0001 14385,4870 r90 top
F13 "01550900M" FUSE-0001 13835.71,4870 r90 top
F14 "01550900M" FUSE-0001 15240,6360 r90 top
F15 "01550900M" FUSE-0001 14605,6360 r90 top
F16 "01550900M" FUSE-0001 13960,6360 r90 top
FB "5003" TEST-POINT-0001 13515,3520 r90 top (schematic designator TP37)
FB "5003" TEST-POINT-0001 11180,3825 r90 top (schematic designator TP16)
FB "5003" TEST-POINT-0001 12695,3990 r90 top (schematic designator TP12)
FB "5003" TEST-POINT-0001 14725,4829.1 r90 top (schematic designator TP29)
FB "5003" TEST-POINT-0001 15365,4834.1 r90 top (schematic designator TP36)
FB "5003" TEST-POINT-0001 14085,4835 r90 top (schematic designator TP23)
FB "5003" TEST-POINT-0001 11930,3989.5 r90 top (schematic designator TP20)
FB "5003" TEST-POINT-0001 14425,3520 r90 top locked (schematic designator TP8)
FB "5003" TEST-POINT-0001 15270,3520 r0 top (schematic designator TP4)
GND "5003" TEST-POINT-0001 11295,5200 r90 top
GND "5003" TEST-POINT-0001 12065,5200 r90 top
GND "5003" TEST-POINT-0001 12805,5200 r90 top
GND "5003" TEST-POINT-0001 13575,5200 r90 top
GND "5003" TEST-POINT-0001 14855,5185 r90 top
GND "5003" TEST-POINT-0001 14215,5195 r90 top
GND "5003" TEST-POINT-0001 14600,2935 r90 top
GND "5003" TEST-POINT-0001 13755,2935 r90 top
GND "5003" TEST-POINT-0001 11295,2945 r90 top
GND "5003" TEST-POINT-0001 12065,2945 r90 top
GND "5003" TEST-POINT-0001 12835,2935 r90 top (schematic designator TP33)
I1 "SRP6540-5R6M" IND_SRP6540-5R6M 13875,5505 r0 top
I2 "SRP6540-5R6M" IND_SRP6540-5R6M 14520,5505 r0 top
I3 "LM1117IMPX-3.3/NOPB" IC-SOT-223-4 13330,5530 r90 top
I4 "LM1117MPX-5.0/NOPB" IC-SOT-223-4 13005,5530 r90 top
I5 "SRP6540-5R6M" IND_SRP6540-5R6M 15155,5505 r0 top
J1 "Molex 43045-0412" CONN-4POS-0002 10860,6235 r90 top
J2 "Molex 43045-0412" CONN-4POS-0002 10860,6685 r90 top
J3 "1546927-2" CONN-1546927-2 10780,2560 r180 top
J4 "0436500215" CONN-2POS-0002 13155,7125 r0 top
J5 "Molex 43045-0412" CONN-4POS-0002 13740,7000 r0 top
J6 "Molex 43045-0812" CONN-8POS-0001 11290,7000 r0 top
J7 "Molex 43045-0412" CONN-4POS-0002 14190,7000 r0 top
J8 "Molex 43045-0812" CONN-8POS-0001 14760,7000 r0 top
J9 "Molex 43650-0315" 43650-0315 12475,7125 r0 top
J10 "Header 5" HDR1X5 12300,6525 r180 top
J11 "Molex 43650-0315" 43650-0315 11910,7125 r0 top
L1 "CSAD1010-150M" IND-15U-0002 15125,3580 r90 top
L2 "CSAD1010-150M" IND-15U-0002 14280,3580 r90 top locked
L3 "CSAD1010-150M" IND-15U-0002 12550,4050 r90 top
L4 "SRR1210-390M" IND_BOURNS_SRR1260 10920,4520 r0 top
L5 "CSAD1010-150M" IND-15U-0002 11785,4049.5 r90 top
L6 "IHLP2525CZER8R2M01" IND25X25CZ 13195,3800 r0 top
Q1 "T2N7002AK,LM" IC-SOT23-3 15260,3875 r90 top
Q2 "T2N7002AK,LM" IC-SOT23-3 14415,3875 r90 top locked
Q3 "T2N7002AK,LM" IC-SOT23-3 12685,4345 r90 top
Q4 "T2N7002AK,LM" IC-SOT23-3 10744.37,5820 r90 top
Q5 "T2N7002AK,LM" IC-SOT23-3 11920,4344.5 r90 top
Q6 "T2N7002AK,LM" IC-SOT23-3 13505,3875 r90 top
Q7 "T2N7002AK,LM" IC-SOT23-3 12085,6775 r0 top
Q8 "T2N7002AK,LM" IC-SOT23-3 12475,6775 r0 top
Q9 "CSD18543Q3AT" IC-8VSONCLIP 11325,2455 r270 top
Q10 "T2N7002AK,LM" NMOS-SOT23-3 13440,6960 r0 top
R1 "RC0402FR-07240RL" RES-0402 15240,3755 r0 top
R2 "RC0603FR-072M15L" RES-0603 15205,2915 r180 top
R3 "RC0402FR-071KL" RES-0402 15300,3775 r270 top
R4 "RC0603FR-07100KL" RES-0603 15270,2975 r180 top
R5 "RC0402FR-07147KL" RES-0402 15170,3615 r90 top
R6 "RC0402FR-0759KL" RES-0402 15160,3515 r0 top
R7 "RTT021783FTH" RES-0402 15135,3150 r270 top
R8 "RC0402FR-0710K5L" RES-0402 15215,3615 r270 top
R9 "RC0402FR-07240RL" RES-0402 14395,3755 r0 top locked
R10 "RC0603FR-072M15L" RES-0603 14360,2915 r180 top locked
R11 "RC0402FR-071KL" RES-0402 14455,3775 r270 top locked
R12 "RC0603FR-07100KL" RES-0603 14425,2975 r180 top locked
R13 "RC0402FR-07147KL" RES-0402 14325,3615 r90 top locked
R14 "RC0402FR-0759KL" RES-0402 14315,3515 r0 top locked
R15 "RTT021783FTH" RES-0402 14290,3155 r270 top locked
R16 "RC0402FR-0710K5L" RES-0402 14370,3615 r270 top locked
R17 "RC0402FR-07240RL" RES-0402 12665,4225 r0 top
R18 "RC0603FR-072M15L" RES-0603 12630,3385 r180 top
R19 "RC0402FR-071KL" RES-0402 12725,4245 r270 top
R20 "RC0603FR-07100KL" RES-0603 12695,3445 r180 top
R21 "RC0402FR-07147KL" RES-0402 12595,4085 r90 top
R22 "RC0402FR-0759KL" RES-0402 12590,3985 r0 top
R23 "RTT021783FTH" RES-0402 12560,3625 r270 top
R24 "RC0402FR-0710K5L" RES-0402 12640,4085 r270 top
R25 "RC0402FR-07240RL" RES-0402 10720.32,5705 r0 top
R26 "RC0603FR-072M15L" RES-0603 11100,3580 r180 top
R27 "RC0402FR-071KL" RES-0402 10785,5724.69 r270 top
R28 "RC0603FR-07100KL" RES-0603 11165,3640 r180 top
R29 "RC0402FR-07348KL" RES-0402 11120,4190 r90 top
R30 "RC0402FR-0743K2L" RES-0402 11060,4180 r0 top
R31 "RTT021783FTH" RES-0402 11030,3820 r270 top
R32 "RC0603FR-0712KL" RES-0603 11170,4135 r90 top
R33 "RC0402FR-07240RL" RES-0402 11900,4224.5 r0 top
R34 "RC0603FR-072M15L" RES-0603 11865,3384.5 r180 top
R35 "RC0402FR-071KL" RES-0402 11960,4244.5 r270 top
R36 "RC0603FR-07100KL" RES-0603 11930,3444.5 r180 top
R37 "RC0402FR-07243KL" RES-0402 11830,4084.5 r90 top
R38 "RC0402FR-0782K5L" RES-0402 11824.68,3984.5 r0 top
R39 "RTT021783FTH" RES-0402 11795,3624.5 r270 top
R40 "RC0402FR-0711K3L" RES-0402 11875,4084.82 r270 top
R41 "RC0603FR-07100KL" RES-0603 14025,5215 r270 top
R42 "RC0603FR-0713K7L" RES-0603 13965,5150 r270 top
R43 "RC0402FR-07240RL" RES-0402 13485,3755 r0 top
R44 "RC0603FR-072M15L" RES-0603 13450,2915 r180 top
R45 "RC0402FR-071KL" RES-0402 13545,3775 r270 top
R46 "RC0603FR-07100KL" RES-0603 13515,2975 r180 top
R47 "RC0402FR-0780K6L" RES-0402 13440,3660 r0 top
R48 "RC0603FR-07100KL" RES-0603 14670,5215 r90 top
R49 "RC0603FR-0722KL" RES-0603 14610,5150 r90 top
R50 "RC0402FR-0710KL" RES-0402 12495,6260 r180 top
R51 "RC0402FR-0710KL" RES-0402 12435.16,6319.84 r180 top
R52 "RC0402FR-0710KL" RES-0402 12395.32,6380 r180 top
R53 "RC0402FR-07470RL" RES-0402 12070,6690 r0 top
R54 "RC0402FR-07470RL" RES-0402 12460,6690 r0 top
R55 "RC1210FR-07120RL" RES-1210 12845,7040 r0 top
R57 "RC0402FR-07100RL" RES-0402 11945,6780 r90 top
R58 "RC0402FR-07100RL" RES-0402 12335,6780 r90 top
R59 "RC0603FR-0747RL" RES-0603 11130,3995 r180 top
R60 "RC0603FR-0747RL" RES-0603 11895,3799.5 r180 top
R61 "RC0603FR-0747RL" RES-0603 15355,5000 r90 top
R62 "TMP6431DECR" RES-0402 11040,3965 r90 top
R63 "TMP6431DECR" RES-0402 11805,3769.5 r90 top
R64 "TMP6431DECR" RES-0402 15320,5090 r0 top
R65 "RC0603FR-0747RL" RES-0603 12660,3800 r180 top
R66 "RC0603FR-0747RL" RES-0603 13495,3355 r180 top
R67 "RC0603FR-0747RL" RES-0603 14075,5005 r90 top
R68 "TMP6431DECR" RES-0402 12570,3770 r90 top
R69 "TMP6431DECR" RES-0402 13400,3320 r90 top
R70 "TMP6431DECR" RES-0402 14040,5095 r0 top
R71 "RC0603FR-0747RL" RES-0603 14715,4995 r90 top
R72 "TMP6431DECR" RES-0402 14685,5090 r0 top
R73 "CSNL2512FTL500" RES-2512 10980,5375 r270 top
R74 "CSNL2512FTL500" RES-2512 11740,5070 r270 top
R75 "CSNL2512FTL500" RES-2512 15270,5980 r270 top
R76 "RC0402FR-0710KL" RES-0402 10630,5255 r90 top
R77 "RC0402FR-0710KL" RES-0402 11395,4954.5 r90 top
R78 "RC0402FR-0710KL" RES-0402 14935,5890 r90 top
R79 "CSNL2512FTL500" RES-2512 12505,5070 r270 top
R80 "CSNL2512FTL500" RES-2512 13305,4555 r270 top
R81 "CSNL2512FTL500" RES-2512 13985,5980 r270 top
R82 "RC0402FR-0710KL" RES-0402 12165,4955 r90 top
R83 "RC0402FR-0710KL" RES-0402 12960,4450 r90 top
R84 "RC0402FR-0710KL" RES-0402 13650,5890 r90 top
R85 "CSNL2512FTL500" RES-2512 14630,5975 r270 top
R86 "RC0402FR-0710KL" RES-0402 14290,5890 r90 top
R87 "RC0603FR-07200KL" RES-0603 11295,2525 r270 top
R88 "RC0603FR-07100KL" RES-0603 11295,2285 r270 top
R89 "RC0603FR-07100KL" RES-0603 15305,5215 r90 top
R90 "RC0603FR-0722KL" RES-0603 15245,5150 r90 top
R91 "RMCF0603ZT0R00" RES-0603 13440,6870 r180 top
R92 "RC0402FR-0736K5L" RES-0402 13405,3555 r270 top
R93 "RTT021783FTH" RES-0402 13380,3155 r270 top
R94 "RT0805BRD0710K4L" RES-0805 13500,3605 r0 top
SW "5003" TEST-POINT-0001 13060,3185 r90 top (schematic designator TP26)
SW "5003" TEST-POINT-0001 10710,3880 r90 top (schematic designator TP15)
SW "5003" TEST-POINT-0001 12240,3690 r90 top (schematic designator TP11)
SW "5003" TEST-POINT-0001 14319.65,5510 r90 top (schematic designator TP28)
SW "5003" TEST-POINT-0001 14954.65,5510 r90 top (schematic designator TP35)
SW "5003" TEST-POINT-0001 13675,5510 r90 top (schematic designator TP22)
SW "5003" TEST-POINT-0001 11475,3684.5 r90 top (schematic designator TP19)
SW "5003" TEST-POINT-0001 13970,3185 r90 top locked (schematic designator TP7)
SW "5003" TEST-POINT-0001 14815,3185 r0 top (schematic designator TP3)
U1 "TPS54561DPRR" IC-10WSON 15025,3250 r90 top
U2 "TPS54561DPRR" IC-10WSON 14180,3250 r90 top locked
U3 "TPS54561DPRR" IC-10WSON 12450,3720.5 r90 top
U4 "TPS54561DPRR" IC-10WSON 10920,3915 r90 top
U5 "TPS54561DPRR" IC-10WSON 11685,3720 r90 top
U6 "TPS54302DDCR" IC-SOT-23-6 13845,5230 r0 top
U7 "TPS54561DPRR" IC-10WSON 13270,3250 r90 top
U8 "TPS54302DDCR" IC-SOT-23-6 14490,5230 r0 top
U9 "STM32G431CBT6" IC-LQFP48 12905,6350 r90 top
U10 "TCAN1044VDRQ1" IC-8SOIC 12845,6820 r0 top
U11 "TPS54302DDCR" IC-SOT-23-6 15125,5230 r0 top
U12 "AD8418AWBRZ-RL" IC-CURR 10775,5365 r180 top
U13 "AD8418AWBRZ-RL" IC-CURR 11540,5064.5 r180 top
U14 "AD8418AWBRZ-RL" IC-CURR 15070,5980 r180 top
U15 "AD8418AWBRZ-RL" IC-CURR 12305,5065 r180 top
U16 "AD8418AWBRZ-RL" IC-CURR 13105,4555 r180 top
U17 "AD8418AWBRZ-RL" IC-CURR 13790.35,5980 r180 top
U18 "AD8418AWBRZ-RL" IC-CURR 14435,5980 r180 top
VBAT "5003" TEST-POINT-0001 12830,2675 r90 top (schematic designator TP32)
? "Comment" RES-2010#1 13795,6665 r0 top
? "Comment" RES-2010#2 14440,6665 r180 top

## Footprints (in the part's own frame and the unit in brackets; to place one, negate y for a bottom-side part, rotate by r counter-clockwise, add the part's x,y. Pads: shape width x height; smd on the part's side, far side on the other; paste and mask are expansions set on the pad)
43650-0315 [mm]
  round 1.27 hole 1.27 unplated: 1(-6,-1.96) 1(6,-1.96)
  rect 1.482x1.482 / inner rect 1.524x1.524 / far side rect 1.482x1.482 hole 1.02: P$1(3,0)
  round 1.53 / inner round 1.524 / far side round 1.53 hole 1.02: P$2(0,0) P$3(-3,0)
  body extent -6.32,-2.47 6.33,3.14, height 10.03
CAP-100U-0001 [mm]
  rect 6.5x2.5 smd: 1(-6.25,0) 2(6.25,0)
  silkscreen extent -9.75,-8.5 8.5,8.5, body extent -9.2,-8.5 9.2,8.5, height 16.5
CAP-0402 [mm]
  rect 0.6x0.7 smd: 1(-0.5,0) 2(0.5,0)
  body extent -0.5,-0.22 0.5,0.23, height 0.5
CAP-0603 [mm]
  rect 1.15x1.1 smd: 1(-0.8,0) 2(0.8,0)
  body extent -0.8,-0.45 0.8,0.45, height 0.8
CAP-0805 [mm]
  rect 1.16x1.47 smd: 1(-0.88,0) 2(0.88,0)
  body extent -1,-0.63 1,0.63, height 0.94
CAP-1206 [mm]
  rect 1.25x2 smd: 1(-1.375,0) 2(1.375,0)
  body extent -1.6,-0.8 1.6,0.8, height 1.5
CAP-1210 [mm]
  rect 1.53x2.72 smd: 1(-1.341,0) 2(1.341,0)
  body extent -1.6,-1.25 1.6,1.25, height 2.7
CAP_EEHZC1V470P [mm]
  rect 3.2x1.6 smd: 1(-2.5,0) 2(2.5,0)
  silkscreen extent -4.25,-3.3 3.3,3.3, body extent -3.65,-3.3 3.65,3.3, height 5.8
CONN-2POS-0002 [mil]
  round 50 hole 50 unplated: 1(-177.17,-77.17) 1(177.17,-77.17)
  rect 58.33x58.33 / inner rect 60x60 / far side rect 58.33x58.33 hole 40.16: 1(59.06,0)
  round 60.24 / inner round 60 / far side round 60.24 hole 40.16: 2(-59.06,0)
  body extent -190,-97 190,123, height 395
CONN-4POS-0002 [mm]
  round 1.02 hole 1.02 unplated: 1(-4.5,3.94) 1(4.5,3.94)
  rect 1.482x1.482 / inner rect 1.524x1.524 / far side rect 1.482x1.482 hole 1.02: 1(1.5,0)
  round 1.53 / inner round 1.524 / far side round 1.53 hole 1.02: 2(-1.5,0) 3(1.5,3) 4(-1.5,3)
  body extent -5.07,-2.45 5.08,6.32, height 10.03
CONN-8POS-0001 [mm]
  rect 1.482x1.482 / inner rect 1.524x1.524 / far side rect 1.482x1.482 hole 1.02: 1(4.5,0)
  round 1.53 / inner round 1.524 / far side round 1.53 hole 1.02: 2(1.5,0) 3(-1.5,0) 4(-4.5,0) 5(4.5,3) 6(1.5,3) 7(-1.5,3) 8(-4.5,3)
  round 1.02 hole 1.02 unplated: ""(-7.5,3.94) ""(7.5,3.94)
  body extent -8.07,-2.45 8.08,6.32, height 10.03
CONN-1546927-2 [mm]
  rect 2.85x2.85 hole 1.9: 1(0,4.127)
  round 2.85 hole 1.9: 2(0,-4.127)
  body extent -11.57,-8.85 4.49,8.85, height 14.99
"DO-214AA (SMBJ)" [mm]
  rect 2.16x2.26 smd: 1(-2.416,0) 2(2.484,0)
  silkscreen extent 3.94,-0.12 4.19,0.13, body extent -2.72,-1.95 2.78,1.95, height 2.45
DO-POWERDI5 [mm] "SMD, 3-Leads, Body 3.975x5.375mm, Pitch 1.84mm"
  rect 1.4x1.39 smd: 1(-2.856,-0.92) 1(-2.856,0.92)
  rect 4.86x3.36 smd: 2(1.126,0)
  silkscreen extent 3.94,-0.12 4.19,0.12, body extent -3.25,-1.98 3.25,1.98, height 1.15
FUSE-0001 [mil]
  rect 167x150 smd paste+0 mask+0: 1(-125.5,0) 2(125.5,0)
  silkscreen extent -192,-99 192,99, body extent -213,-103 213,103, height 10
HDR1X5 [mm] "Connector; Header; 5 Position"
  rect 1.5x1.5 hole 0.9: 1(0,0)
  round 1.5 hole 0.9: 2(2.54,0) 3(5.08,0) 4(7.62,0) 5(10.16,0)
  silkscreen extent -1.27,-1.27 11.43,1.27
IC-8SOIC [mm]
  rect 0.6x1.5 smd: 1(-1.905,-2.5) 2(-0.635,-2.5) 3(0.635,-2.5) 4(1.905,-2.5) 5(1.905,2.5) 6(0.635,2.5) 7(-0.635,2.5) 8(-1.905,2.5)
  silkscreen extent -2.03,-3.93 -1.78,-3.69, body extent -2.45,-3 2.45,3, height 1.75
IC-8VSONCLIP [mm]
  rect 0.4x0.7 smd paste-100 mask+0.05: 1(2.812,0.877) 2(0.862,0.877) 2(1.512,0.877) 2(2.162,0.877) 3(0.862,4.077) 3(1.512,4.077) 3(2.162,4.077) 3(2.812,4.077)
  rect 2.45x1.9 smd paste-100 mask+0.05: 3(1.837,2.917)
  silkscreen extent 0.19,0.03 3.49,4.18, body extent 0.18,0.89 3.48,4.19, height 1.1
IC-10WSON [mm]
  rect 0.6x0.3 smd: 1(-1.9,1.6) 2(-1.9,0.8) 3(-1.9,0) 4(-1.9,-0.8) 5(-1.9,-1.6) 6(1.9,-1.6) 7(1.9,-0.8) 8(1.9,0) 9(1.9,0.8) 10(1.9,1.6)
  rect 2.6x3 smd: 11(0,0)
  body extent -2,-2 2,2, height 0.8
IC-CURR [mm]
  oval 0.588x2.045 smd paste+0 mask+0.051: 1(-1.905,-2.772) 2(-0.635,-2.772) 3(0.635,-2.772) 4(1.905,-2.772) 5(1.905,2.772) 6(0.635,2.772) 7(-0.635,2.772) 8(-1.905,2.772)
  silkscreen extent -2.71,-2.78 2.53,1.52, body extent -2.5,-3.18 2.5,3.02, height 1.76
IC-LQFP48 [mil]
  rect 47x12 smd paste+0 mask+0: 1(-167.32,108.27) 2(-167.32,88.58) 3(-167.32,68.9) 4(-167.32,49.21) 5(-167.32,29.53) 6(-167.32,9.84) 7(-167.32,-9.84) 8(-167.32,-29.53) 9(-167.32,-49.21) 10(-167.32,-68.9) 11(-167.32,-88.58) 12(-167.32,-108.27) 25(167.32,-108.27) 26(167.32,-88.58) 27(167.32,-68.9) 28(167.32,-49.21) 29(167.32,-29.53) 30(167.32,-9.84) 31(167.32,9.84) 32(167.32,29.53) 33(167.32,49.21) 34(167.32,68.9) 35(167.32,88.58) 36(167.32,108.27)
  rect 12x47 smd paste+0 mask+0: 13(-108.27,-167.32) 14(-88.58,-167.32) 15(-68.9,-167.32) 16(-49.21,-167.32) 17(-29.53,-167.32) 18(-9.84,-167.32) 19(9.84,-167.32) 20(29.53,-167.32) 21(49.21,-167.32) 22(68.9,-167.32) 23(88.58,-167.32) 24(108.27,-167.32) 37(108.27,167.32) 38(88.58,167.32) 39(68.9,167.32) 40(49.21,167.32) 41(29.53,167.32) 42(9.84,167.32) 43(-9.84,167.32) 44(-29.53,167.32) 45(-49.21,167.32) 46(-68.9,167.32) 47(-88.58,167.32) 48(-108.27,167.32)
  silkscreen extent -214,-211 211,211, body extent -177,-177 177,177, height 63
IC-SOT23-3 [mm]
  rect 0.6x0.7 smd: 1(-0.95,-1) 2(0.95,-1) 3(0,1)
  body extent -1.46,-1.18 1.46,1.19, height 1.12
IC-SOT-23-6 [mm]
  rect 1.2x0.65 smd paste+0 mask+0.051: 1(-1.475,0.95) 2(-1.475,0) 3(-1.475,-0.95) 4(1.475,-0.95) 5(1.475,0) 6(1.475,0.95)
  silkscreen extent -2.79,0.89 -2.54,1.14, body extent -1.4,-1.45 1.4,1.45, height 0.97
IC-SOT-223-4 [mm]
  rect 1.4x1.2 smd mask+0.07: 1(-3,2.3) 3(-3,-2.3) 4(-3,0)
  rect 1.4x3.5 smd: 2(3,0)
  body extent -3.5,-3.25 3.5,3.25, height 1.68
IND25X25CZ [mil]
  rect 98x135 smd paste-67.5 mask-67.5: 1(-107,0) 2(107,0)
  silkscreen extent -155,-138 155,138, body extent -150,-133 150,133, height 118
IND-15U-0002 [mm] "12V Buck"
  rect 3.3x3.4 smd paste+0 mask+0: 1(3.175,7.62) 1(8.001,7.62) 2(3.175,1.524) 2(8.001,1.524)
  silkscreen extent 5.08,-0.25 6.11,9.4, body extent -0.19,-0.33 11.11,9.47, height 10.79
IND_BOURNS_SRR1260 [mil]
  rect 114x213 smd paste+0 mask+0: 1(-191,0) 2(191,0)
  silkscreen extent -257,-257 257,257, body extent -252,-252 252,252, height 256
IND_SRP6540-5R6M [mm]
  rect 1.85x3.4 smd: 1(-2.775,0) 2(2.775,0)
  silkscreen extent -3.6,-3.25 3.6,3.25, body extent -3.59,-3.25 3.59,3.25, height 4.05
LED-0603 [mm]
  rect 0.8x0.8 smd: 1(2.291,0.751) 2(0.589,0.751)
  silkscreen extent -0.2,0.34 1.52,1.13, body extent 0.65,0.36 2.25,1.16, height 0.39
NMOS-SOT23-3 [mm]
  rect 0.6x0.7 smd: 1(-0.95,-1) 2(0.95,-1) 3(0,1)
  body extent -1.46,-1.18 1.46,1.19, height 1.12
RES-0402 [mm]
  rect 0.6x0.7 smd: 1(-0.5,0) 2(0.5,0)
  body extent -0.5,-0.25 0.5,0.25, height 0.3
RES-0603 [mm]
  rect 1.15x1.1 smd: 1(-0.8,0) 2(0.8,0)
  body extent -0.8,-0.4 0.8,0.4, height 0.43
RES-0805 [mm]
  rect 1.2x1.2 smd: 1(-0.95,0) 2(0.95,0)
  body extent -1,-0.6 1,0.6, height 0.71
RES-1210 [mm] "Chip Resistor, 2-Leads, Body 3.10x2.60mm, IPC High Density"
  rect 0.95x2.6 smd: 1(-1.275,0) 2(1.275,0)
  body extent -1.6,-1.35 1.6,1.35, height 0.6
RES-2010#1 [mm]
  rect 1.26x2.72 smd: 2(2.325,0) 5V_LDO(-2.325,0)
  body extent -2.5,-1.25 2.5,1.25, height 0.7
RES-2010#2 [mm]
  rect 1.26x2.72 smd: 1(-2.325,0) 2(2.325,0)
  body extent -2.5,-1.25 2.5,1.25, height 0.7
RES-2512 [mil]
  rect 78x137 smd paste+0 mask+0: 1(-103,5) 2(103,5)
  body extent -126,-58 124,68, height 49
TEST-POINT-0001 [mm] "2024 miniature test point"
  round 1.3 hole 1: 1(0,0)
  body extent -1.27,-1.27 1.27,1.27, height 4.57